# Altium PCB flight-controller.PcbDoc
Units mil, origin at the board's own origin, x right, y up, seen from the top; angles counter-clockwise.
Board outline 6000 x 4000 mil, 4 copper layers (Component Side, Ground Plane, Power Plane, Solder Side), stack 60.4 mil thick; 114 components, 84 nets, 385 pads, 4 vias.
Unrouted connection lines stored in the file: 278.
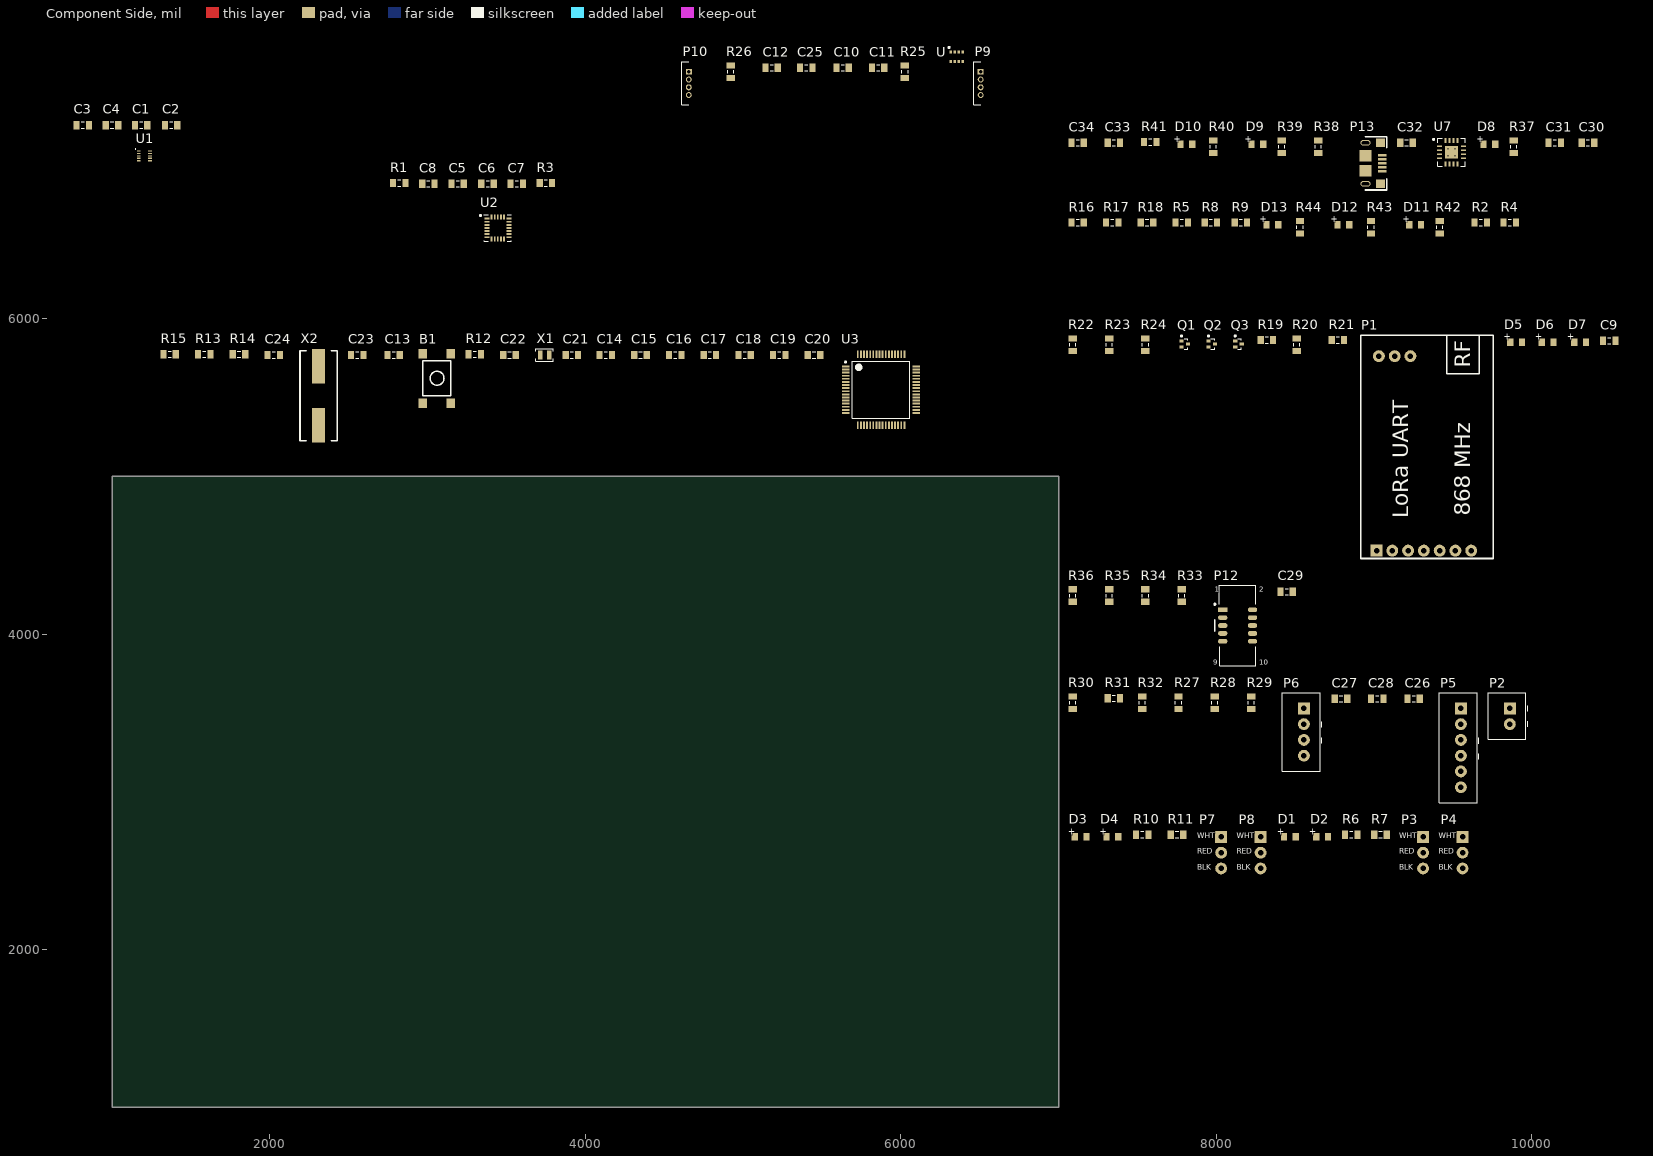
[diagram p0: Component Side view]
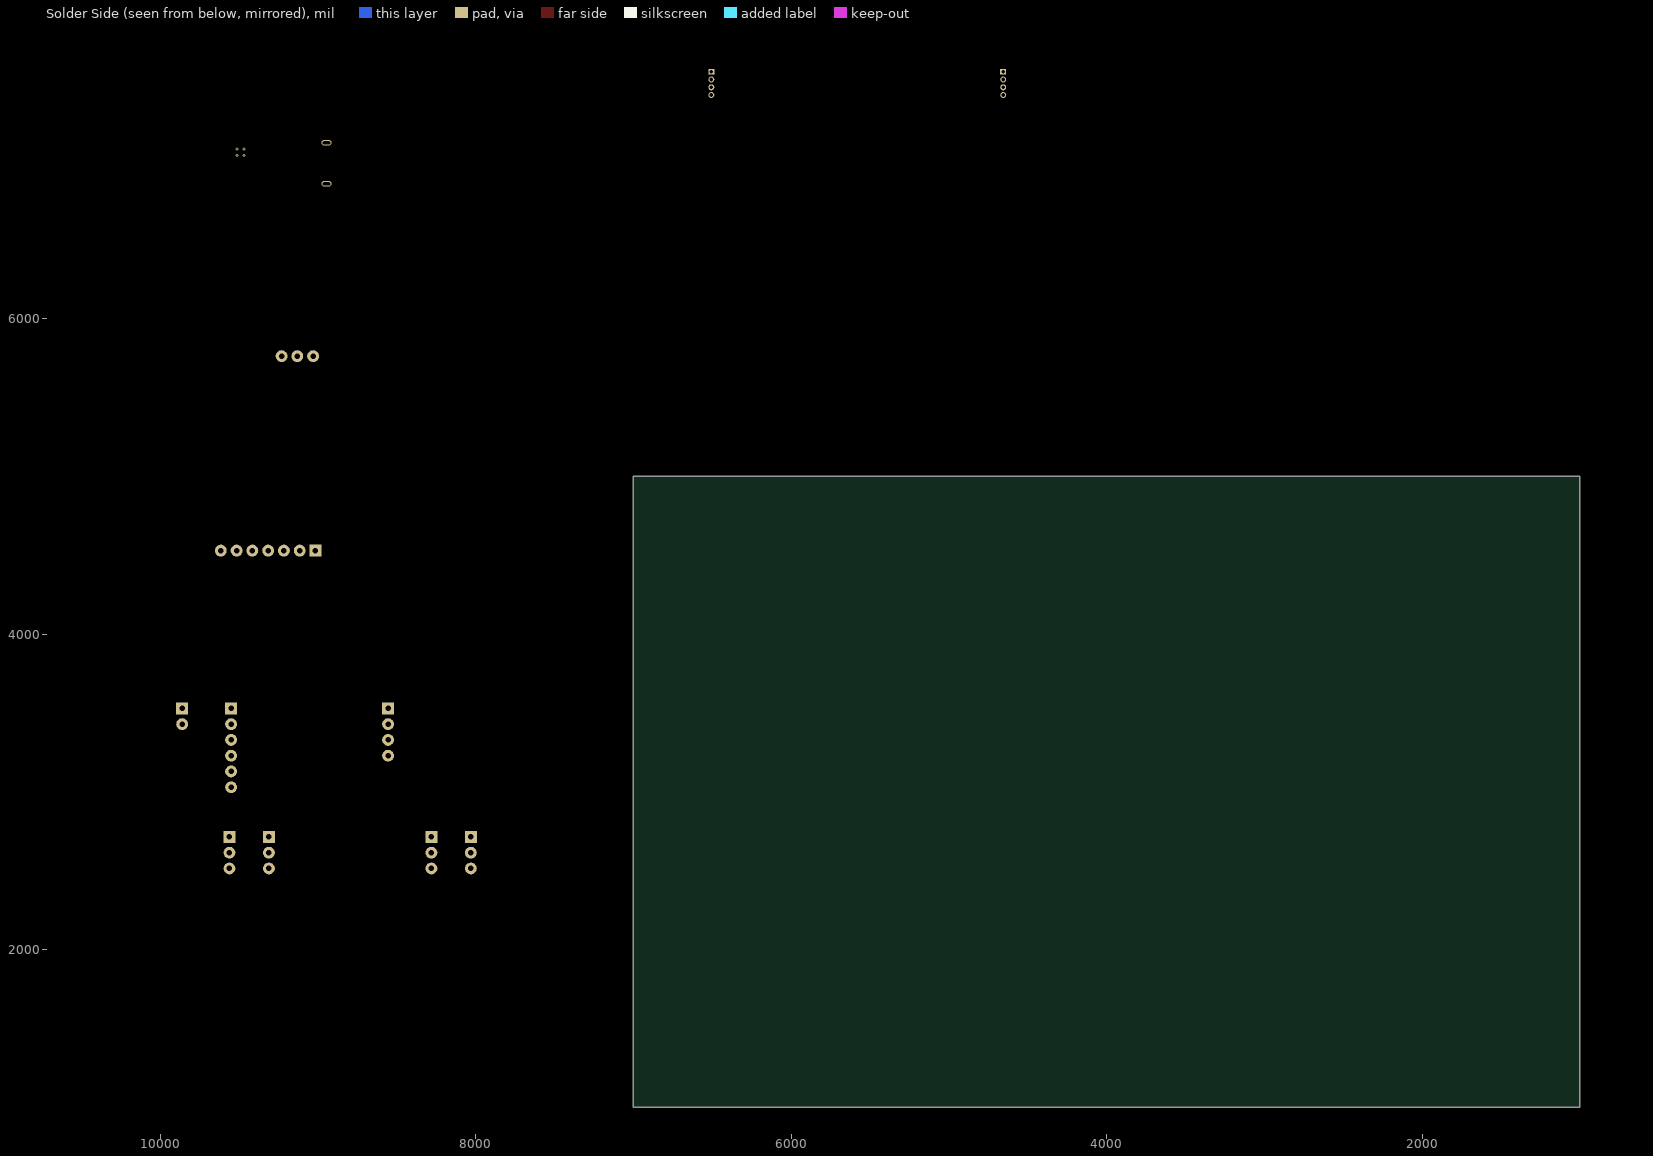
[diagram p1: Solder Side view, seen from below]
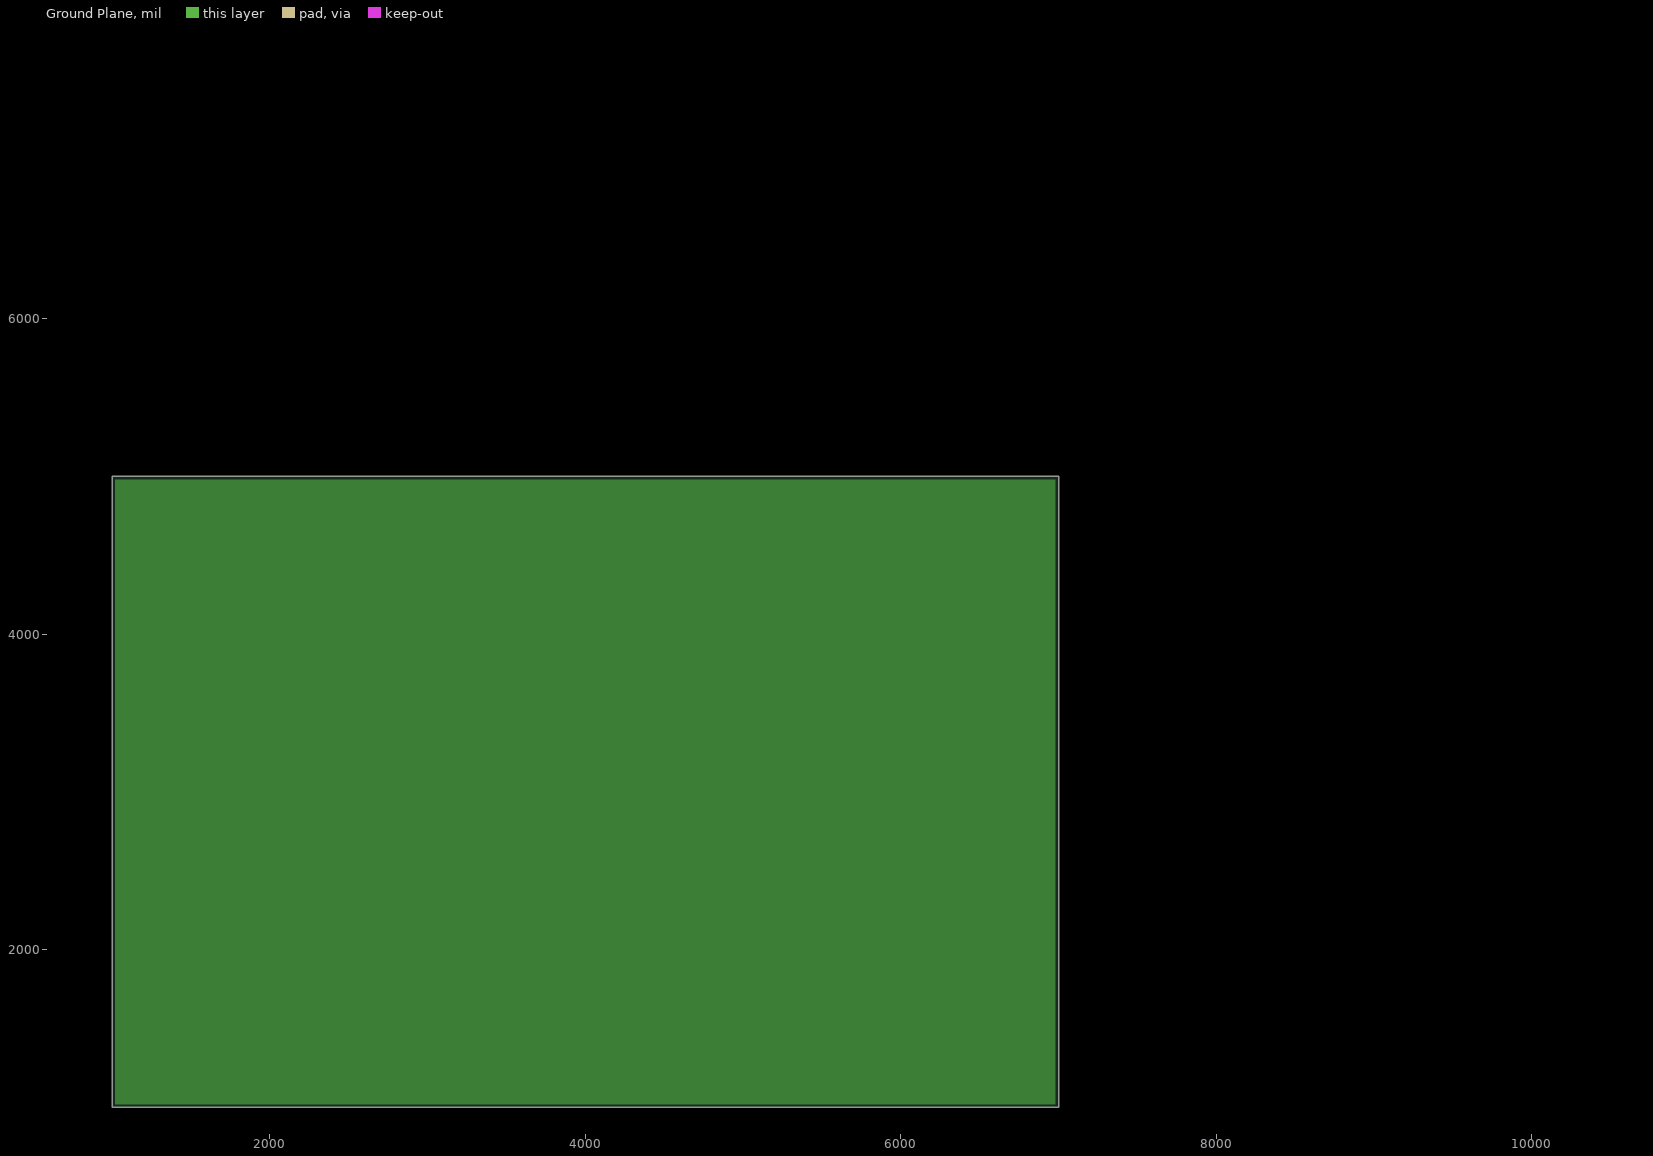
[diagram p2: Ground Plane, clearances drawn from the general rule]
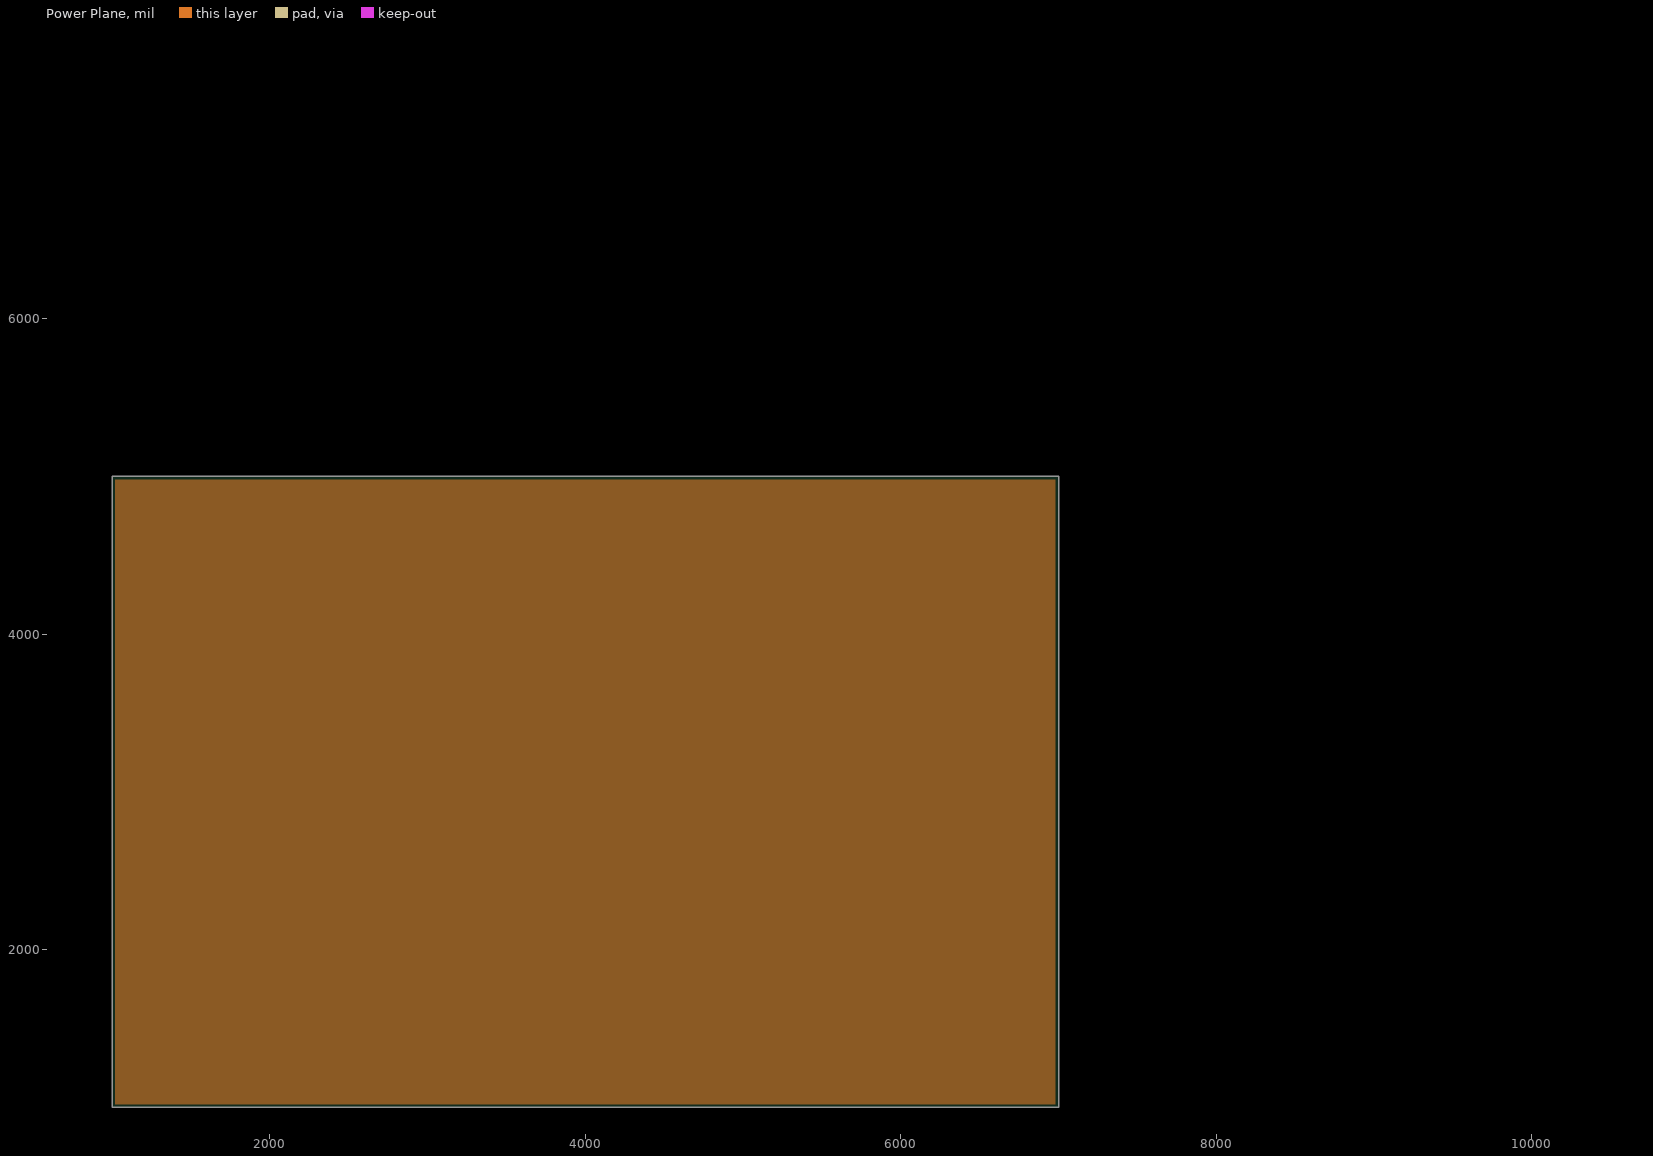
[diagram p3: Power Plane, clearances drawn from the general rule]

## Layer stack, top to bottom
Top Solder: solder mask 0.4, Solder Resist, Dk 3.5
Component Side: signal copper 1.4
Dielectric 1: prepreg 7.5, Dk 4.3
Ground Plane: plane copper 2.8
Dielectric 3: core 37, FR-4, Dk 4.3
Power Plane: plane copper 2.8
Dielectric 4: prepreg 7.5, Dk 4.3
Solder Side: signal copper 1.4
Bottom Solder: solder mask 0.4, Solder Resist, Dk 3.5

## Board outline
1000,1000 7000,1000 7000,5000 1000,5000

## Design rules (kind name [scope] priority, off if disabled: settings)
Clearance [All] p1: gap=10 ignorepadtopadclearanceinfootprint=FALSE except(0: Arc-Hole Track-Hole SMDPad-Hole THPad-Hole Via-Hole Fill-Hole Poly-Hole Region-Hole Text-Hole)
PlaneClearance [All] p1: clearance=20
PlaneConnect [All] p1: planeconnectstyle=Relief reliefexpansion=20 reliefentries=4 reliefconductorwidth=10 reliefairgap=10
PolygonConnect [All] p1: connectstyle=Relief reliefconductorwidth=10 reliefentries=4 polygonreliefangle="90 Angle" airgapwidth=10
RoomDefinition usb_serial [InComponentClass('usb_serial')] p1: confinementstyle=ConfineIn formatcopy=TRUE lockcomponents=FALSE outline 7045,6805 10475,6805 10475,7265 7045,7265
RoomDefinition top_level [InComponentClass('top_level')] p2: confinementstyle=ConfineIn formatcopy=TRUE lockcomponents=FALSE outline 7045,6505 9935,6505 9935,6755 7045,6755
RoomDefinition sensors [InComponentClass('sensors')] p3: confinementstyle=ConfineIn formatcopy=TRUE lockcomponents=FALSE outline 4600.63,7345 6690.63,7345 6690.63,7740 4600.63,7740
RoomDefinition radio [InComponentClass('radio')] p4: confinementstyle=ConfineIn formatcopy=TRUE lockcomponents=FALSE outline 7045,4470 10565,4470 10565,6010 7045,6010
RoomDefinition programming [InComponentClass('programming')] p5: confinementstyle=ConfineIn formatcopy=TRUE lockcomponents=FALSE outline 7045,3790 8565,3790 8565,4420 7045,4420
RoomDefinition power [InComponentClass('power')] p6: confinementstyle=ConfineIn formatcopy=TRUE lockcomponents=FALSE outline 7045,2920 9985,2920 9985,3740 7045,3740
RoomDefinition motor_control [InComponentClass('motor_control')] p7: confinementstyle=ConfineIn formatcopy=TRUE lockcomponents=FALSE outline 7045,2460 9615,2460 9615,2875 7045,2875
RoomDefinition mcu_power [InComponentClass('mcu_power')] p8: confinementstyle=ConfineIn formatcopy=TRUE lockcomponents=FALSE outline 1289.37,5205 6144.37,5205 6144.37,5920 1289.37,5920
RoomDefinition gyro [InComponentClass('gyro')] p9: confinementstyle=ConfineIn formatcopy=TRUE lockcomponents=FALSE outline 2745,6360 4100,6360 4100,7005 2745,7005
RoomDefinition accelerometer [InComponentClass('accelerometer')] p10: confinementstyle=ConfineIn formatcopy=TRUE lockcomponents=FALSE outline 739.13,6822.24 1624.13,6822.24 1624.13,7377.24 739.13,7377.24
RoutingVias [All] p1: holewidth=28 width=50 viastyle="Through Hole" minholewidth=28 minwidth=50 maxholewidth=28 maxwidth=50
SolderMaskExpansion [All] p1: expansion=4
Width [All] p1: maxlimit=10 minlimit=10 preferedwidth=10
28 further rules are at their usual default settings.

## Classes and differential pairs
component class usb_serial: C30 C31 C32 C33 C34 D8 D9 D10 P13 R37 R38 R39 R40 R41 U7
component class top_level: D11 D12 D13 R2 R4 R5 R8 R9 R16 R17 R18 R42 R43 R44
component class sensors: C10 C11 C12 C25 P9 P10 R25 R26 U
component class radio: C9 D5 D6 D7 P1 Q1 Q2 Q3 R19 R20 R21 R22 R23 R24
component class programming: C29 P12 R33 R34 R35 R36
component class power: C26 C27 C28 P2 P5 P6 R27 R28 R29 R30 R31 R32
component class motor_control: D1 D2 D3 D4 P3 P4 P7 P8 R6 R7 R10 R11
component class mcu_power: B1 C13 C14 C15 C16 C17 C18 C19 C20 C21 C22 C23 C24 R12 R13 R14 R15 U3 X1 X2
component class gyro: C5 C6 C7 C8 R1 R3 U2
component class accelerometer: C1 C2 C3 C4 U1

## Components (designator, comment, footprint, x,y, rotation, side; value= is the part's Value field where it differs from the comment)
B1 "Tactile Switch" "6mm Tactile Switch" 2969.37,5465 r90 top
C1 "1 uF" CAP-CER-0805-TALL 1184.13,7227.24 r0 top
C2 "0.1 uF" CAP-CER-0805-SHORT 1374.13,7227.24 r0 top
C3 "0.1 uF" CAP-CER-0805-SHORT 814.13,7227.24 r0 top
C4 "0.1 uF" CAP-CER-0805-SHORT 999.13,7227.24 r0 top
C5 "1 uF" CAP-CER-0805-TALL 3190,6855 r0 top
C6 "0.1 uF" CAP-CER-0805-SHORT 3380,6855 r0 top
C7 "0.1 uF" CAP-CER-0805-SHORT 3565,6855 r0 top
C8 "0.1 uF" CAP-CER-0805-SHORT 3005,6855 r0 top
C9 "1 uF" CAP-CER-0805-TALL 10490,5860 r0 top
C10 "0.1 uF" CAP-CER-0805-SHORT 5630.63,7590 r0 top
C11 "10 nF" CAP-CER-0805-SHORT 5855.63,7590 r0 top
C12 "0.1 uF" CAP-CER-0805-SHORT 5180.63,7590 r0 top
C13 "0.1 uF" CAP-CER-0805-SHORT 2784.37,5770 r0 top
C14 "4.7 uF" CAP-CER-0805-TALL 4129.37,5770 r0 top
C15 "0.1 uF" CAP-CER-0805-SHORT 4349.37,5770 r0 top
C16 "0.1 uF" CAP-CER-0805-SHORT 4569.37,5770 r0 top
C17 "0.1 uF" CAP-CER-0805-SHORT 4789.37,5770 r0 top
C18 "0.1 uF" CAP-CER-0805-SHORT 5009.37,5770 r0 top
C19 "1 uF" CAP-CER-0805-TALL 5229.37,5770 r0 top
C20 "10 nF" CAP-CER-0805-SHORT 5449.37,5770 r0 top
C21 "1 pF" CAP-CER-0805-SHORT 3914.37,5770 r0 top
C22 "1 pF" CAP-CER-0805-SHORT 3519.37,5770 r0 top
C23 "16 pF" CAP-CER-0805-SHORT 2554.37,5770 r0 top
C24 "16 pF" CAP-CER-0805-SHORT 2024.37,5770 r0 top
C25 "0.1 uF" CAP-CER-0805-SHORT 5400.63,7590 r0 top
C26 "100 pF" CAP-CER-0805-SHORT 9250,3590 r0 top
C27 "4.7 uF" CAP-CER-0805-TALL 8790,3590 r0 top
C28 "4.7 uF" CAP-CER-0805-TALL 9020,3590 r0 top
C29 "0.1 uF" CAP-CER-0805-SHORT 8445,4270 r0 top
C30 "4.7 uF" CAP-CER-0805-TALL 10355,7115 r0 top
C31 "0.1 uF" CAP-CER-0805-SHORT 10145,7115 r0 top
C32 "47 pF" CAP-CER-0805-SHORT 9205,7115 r0 top
C33 "47 pF" CAP-CER-0805-SHORT 7350,7115 r0 top
C34 "0.1 uF" CAP-CER-0805-SHORT 7120,7115 r0 top
D1 "LED-WHT-20mA" LED-0805 8465,2715 r0 top
D2 "LED-WHT-20mA" LED-0805 8670,2715 r0 top
D3 "LED-WHT-20mA" LED-0805 7140,2715 r0 top
D4 "LED-WHT-20mA" LED-0805 7340,2715 r0 top
D5 "LED-WHT-20mA" LED-0805 9900,5850 r0 top
D6 "LED-WHT-20mA" LED-0805 10100,5850 r0 top
D7 "LED-WHT-20mA" LED-0805 10305,5850 r0 top
D8 "LED-WHT-20mA" LED-0805 9730,7105 r0 top
D9 "LED-WHT-20mA" LED-0805 8260,7105 r0 top
D10 "LED-WHT-20mA" LED-0805 7810,7105 r0 top
D11 "LED-WHT-20mA" LED-0805 9260,6595 r0 top
D12 "LED-WHT-20mA" LED-0805 8805,6595 r0 top
D13 "LED-WHT-20mA" LED-0805 8355,6595 r0 top
P1 "LoRa 868 MHz Radio" "LoRa Breakout" 9015,4530 r90 top
P2 "2Pos Pin Header" "2Pos Pin Header JST" 9860,3530 r0 top
P3 "ESC Data" ESC 9310,2715 r0 top
P4 "ESC Data" ESC 9560,2715 r0 top
P5 "6Pos Pin Header" "6Pos Pin Header JST" 9550,3530 r0 top
P6 "4Pos Pin Header" "4Pos Pin Header JST" 8555,3530 r0 top
P7 "ESC Data" ESC 8030,2715 r0 top
P8 "ESC Data" ESC 8280,2715 r0 top
P9 "Lidar Range Sensor" "4x1 Shrouded Header 1.25mm" 6505.63,7565 r0 top
P10 "Lidar Range Sensor" "4x1 Shrouded Header 1.25mm" 4655.63,7565 r0 top
P12 "JTAG Header" "SMD Header 5x2x1.27mm" 8040,4155 r0 top
P13 "USB Micro B" "USB Micro B" 8945,6985 r0 top
Q1 "2N7002K" SC-89 7800,5840 r0 top
Q2 "2N7002K" SC-89 7970,5840 r0 top
Q3 "2N7002K" SC-89 8140,5840 r0 top
R1 "47K" RES-0805 2820,6860 r0 top
R2 "10K" RES-0805 9675,6610 r0 top
R3 "47K" RES-0805 3750,6860 r0 top
R4 "10K" RES-0805 9860,6610 r0 top
R5 "47K" RES-0805 7780,6610 r0 top
R6 "330" RES-0805 8855,2730 r0 top
R7 "330" RES-0805 9040,2730 r0 top
R8 "47K" RES-0805 7965,6610 r0 top
R9 "47K" RES-0805 8155,6610 r0 top
R10 "330" RES-0805 7530,2730 r0 top
R11 "330" RES-0805 7750,2730 r0 top
R12 "0" RES-0805 3299.37,5775 r0 top
R13 "10K" RES-0805 1584.37,5775 r0 top
R14 "0" RES-0805 1804.37,5775 r0 top
R15 "10K" RES-0805 1364.37,5775 r0 top
R16 "47K" RES-0805 7120,6610 r0 top
R17 "47K" RES-0805 7340,6610 r0 top
R18 "47K" RES-0805 7560,6610 r0 top
R19 "330" RES-0805 8320,5865 r0 top
R20 "330" RES-0805 8510,5835 r90 top
R21 "330" RES-0805 8770,5865 r0 top
R22 "100K" RES-0805 7090,5835 r90 top
R23 "100K" RES-0805 7320,5835 r90 top
R24 "100K" RES-0805 7550,5835 r90 top
R25 "0" RES-0805 6025.63,7565 r90 top
R26 "0" RES-0805 4920.63,7565 r90 top
R27 "100K" RES-0805 7760,3565 r90 top
R28 "300K" RES-0805 7990,3565 r90 top
R29 "750K" RES-0805 8220,3565 r90 top
R30 "100K" RES-0805 7090,3565 r90 top
R31 "100K" RES-0805 7350,3595 r0 top
R32 "150K" RES-0805 7530,3565 r90 top
R33 "100K" RES-0805 7780,4245 r90 top
R34 "100K" RES-0805 7550,4245 r90 top
R35 "100K" RES-0805 7320,4245 r90 top
R36 "100K" RES-0805 7090,4245 r90 top
R37 "330" RES-0805 9885,7090 r90 top
R38 "33" RES-0805 8645,7090 r90 top
R39 "33" RES-0805 8415,7090 r90 top
R40 "330" RES-0805 7980,7090 r90 top
R41 "330" RES-0805 7580,7120 r0 top
R42 "680" RES-0805 9415,6580 r90 top
R43 "680" RES-0805 8980,6580 r90 top
R44 "680" RES-0805 8530,6580 r90 top
U "BMP280" LGA8 6315.63,7630 r90 top
U1 "3-Axis Accelerometer" SON10 1204.57,7031.5 r0 top
U2 "3-Axis Gyroscope" QFN24 3445,6575.12 r0 top
U3 "LQFP-64 STM32F303RE" LQFP64 5874.37,5550 r0 top
U7 "FTDI USB to UART" QFN16-0.65 9490,7055 r0 top
X1 "32.768 MHz, 4 pF" XTAL-0805 3714.37,5770 r0 top
X2 "8 MHz, 18 pF" HC-49 2309.37,5325 r90 top

## Footprints (in the part's own frame and the unit in brackets; to place one, negate y for a bottom-side part, rotate by r counter-clockwise, add the part's x,y. Pads: shape width x height; smd on the part's side, far side on the other; paste and mask are expansions set on the pad)
"2Pos Pin Header JST" [mil] "Female, 0.1\" Pitch"
  rect 75x75 hole 35: 1(0,0)
  round 75 hole 35: 2(0,-100)
  silkscreen extent -138,-197 114,98, body extent -132,-192 98,92, height 284
"4Pos Pin Header JST" [mil] "Male, 0.1\" Pitch"
  rect 75x75 hole 35: 1(0,0)
  round 75 hole 35: 2(0,-100) 3(0,-200) 4(0.01,-300)
  silkscreen extent -138,-398 114,98, body extent -132,-392 98,92, height 284
"4x1 Shrouded Header 1.25mm" [mm] "1.25mm Pitch"
  rect 0.95x0.95 hole 0.6: 1(0,0)
  round 0.95 hole 0.6: 2(0,-1.25) 3(0,-2.5) 4(0,-3.75)
  silkscreen extent -1.14,-5.33 0,1.65, body extent -0.9,-5.2 4.5,1.45, height 3.68
"6mm Tactile Switch" [mm]
  rect 1.55x1.3 smd: 1(0,0) 1(7.95,0) 2(0,-4.5) 2(7.95,-4.5)
  silkscreen extent 1.2,-4.5 6.8,0, body extent -0.5,-5.4 8.5,0.8, height 4.3
"6Pos Pin Header JST" [mil] "Male, 0.1\" Pitch"
  rect 75x75 hole 35: 1(0,0)
  round 75 hole 35: 2(0,-100) 3(0,-200) 4(0.01,-300) 5(0.01,-400) 6(0.02,-500)
  silkscreen extent -138,-598 114,98, body extent -132,-592 98,92, height 284
CAP-CER-0805-SHORT [mm] "Chip Capacitor, 2-Leads, Body 2.00x1.25mm, IPC Medium Density"
  rect 1x1.35 smd: 1(-1,0) 2(1,0)
  silkscreen extent -0.25,-0.5 0.25,0.5, body extent -1.1,-0.72 1.1,0.72, height 0.9
CAP-CER-0805-TALL [mm] "Chip Capacitor, 2-Leads, Body 2.00x1.25mm, IPC Medium Density"
  rect 1x1.35 smd: 1(-1,0) 2(1,0)
  silkscreen extent -0.25,-0.5 0.25,0.5, body extent -1.1,-0.72 1.1,0.72, height 1.1
ESC [mil] "Male, 0.1\" Pitch"
  rect 75x75 hole 35: 1(0,0)
  round 75 hole 35: 2(0,-100) 3(0,-200)
  body extent -50,-250 50,50, height 374
HC-49 [mm] "Crystal Oscillator"
  rect 5.6x2.1 smd: 1(0,0) 2(9.5,0)
  silkscreen extent -2.5,-3 12,3, body extent -1.92,-2.5 11.58,2.5, height 4.3
LED-0805 [mm] "Chip Diode, 2-Leads, Body 2.00x1.25mm, IPC Medium Density"
  rect 1x1.2 smd: 1(-0.95,0) 2(0.95,0)
  body extent -0.9,-0.62 0.9,0.63, height 0.8
LGA8 [mm] "Digital Pressure Sensor"
  rect 0.5x0.35 smd: 1(1.55,0) 2(1.55,-0.65) 3(1.55,-1.3) 4(1.55,-1.95) 5(0,-1.95) 6(0,-1.3) 7(0,-0.65) 8(0,0)
  silkscreen extent 2.16,0.13 2.41,0.38, body extent -0.22,-2.27 1.78,0.23, height 0.95
"LoRa Breakout" [mil] "0.1\" Pitch"
  rect 75x75 hole 35: 1(0,0)
  round 75 hole 35: 2(0,-100) 3(0,-200) 4(0,-300) 5(0,-400) 6(0,-500) 7(0,-600) H(1232.5,-215) H(1232.5,-115) H(1232.5,-15)
  silkscreen extent -50,-740 1365,100
LQFP64 [mm] "TSQFP, 64-Leads, Body 10.00x10.00mm, Pitch 0.50mm, IPC Medium Density"
  rect 1.2x0.3 smd: 1(-5.7,3.75) 2(-5.7,3.25) 3(-5.7,2.75) 4(-5.7,2.25) 5(-5.7,1.75) 6(-5.7,1.25) 7(-5.7,0.75) 8(-5.7,0.25) 9(-5.7,-0.25) 10(-5.7,-0.75) 11(-5.7,-1.25) 12(-5.7,-1.75) 13(-5.7,-2.25) 14(-5.7,-2.75) 15(-5.7,-3.25) 16(-5.7,-3.75) 33(5.7,-3.75) 34(5.7,-3.25) 35(5.7,-2.75) 36(5.7,-2.25) 37(5.7,-1.75) 38(5.7,-1.25) 39(5.7,-0.75) 40(5.7,-0.25) 41(5.7,0.25) 42(5.7,0.75) 43(5.7,1.25) 44(5.7,1.75) 45(5.7,2.25) 46(5.7,2.75) 47(5.7,3.25) 48(5.7,3.75)
  rect 0.3x1.2 smd: 17(-3.75,-5.7) 18(-3.25,-5.7) 19(-2.75,-5.7) 20(-2.25,-5.7) 21(-1.75,-5.7) 22(-1.25,-5.7) 23(-0.75,-5.7) 24(-0.25,-5.7) 25(0.25,-5.7) 26(0.75,-5.7) 27(1.25,-5.7) 28(1.75,-5.7) 29(2.25,-5.7) 30(2.75,-5.7) 31(3.25,-5.7) 32(3.75,-5.7) 49(3.75,5.7) 50(3.25,5.7) 51(2.75,5.7) 52(2.25,5.7) 53(1.75,5.7) 54(1.25,5.7) 55(0.75,5.7) 56(0.25,5.7) 57(-0.25,5.7) 58(-0.75,5.7) 59(-1.25,5.7) 60(-1.75,5.7) 61(-2.25,5.7) 62(-2.75,5.7) 63(-3.25,5.7) 64(-3.75,5.7)
  silkscreen extent -5.82,-4.6 4.6,4.6, body extent -6,-6 6,6, height 1.6
QFN16-0.65 [mm] "QFN, 16-Leads, Body 4.00x4.00mm, Pitch 0.65mm, Thermal Pad 2.08x2.08mm, IPC Medium Density"
  rect 0.8x0.28 smd: 1(-1.9,0.975) 2(-1.9,0.325) 3(-1.9,-0.325) 4(-1.9,-0.975) 9(1.9,-0.975) 10(1.9,-0.325) 11(1.9,0.325) 12(1.9,0.975)
  rect 0.28x0.8 smd: 5(-0.975,-1.9) 6(-0.325,-1.9) 7(0.325,-1.9) 8(0.975,-1.9) 13(0.975,1.9) 14(0.325,1.9) 15(-0.325,1.9) 16(-0.975,1.9)
  rect 2.08x2.08 smd: 17(0,0)
  silkscreen extent -3,-2.23 2.23,2.22, body extent -2.12,-2.12 2.12,2.12, height 0.8
QFN24 [mm] "QFN, 24-Leads, Body 4.00x4.00mm, Pitch 0.50mm, IPC Medium Density"
  rect 0.8x0.3 smd: 1(-1.775,1.5) 2(-1.775,1) 3(-1.775,0.5) 4(-1.775,0) 5(-1.775,-0.5) 6(-1.775,-1) 7(-1.775,-1.5) 13(1.775,-1.5) 14(1.775,-1) 15(1.775,-0.5) 16(1.775,0) 17(1.775,0.5) 18(1.775,1) 19(1.775,1.5)
  rect 0.3x0.8 smd: 8(-1,-1.775) 9(-0.5,-1.775) 10(0,-1.775) 11(0.5,-1.775) 12(1,-1.775) 20(1,1.775) 21(0.5,1.775) 22(0,1.775) 23(-0.5,1.775) 24(-1,1.775)
  silkscreen extent -2.92,-2.15 2.15,2.15, body extent -2.05,-2.05 2.05,2.05, height 1.05
RES-0805 [mm] "Chip Resistor, 2-Leads, Body 2.00x1.25mm, IPC Medium Density"
  rect 1x1.35 smd: 1(-1,0) 2(1,0)
  silkscreen extent -0.25,-0.5 0.25,0.5, body extent -1.07,-0.7 1.07,0.7, height 0.65
SC-89 [mm] "SOT23, 3-Leads, Body 1.60x1.60mm, Pitch 0.50mm, IPC Medium Density"
  rect 0.65x0.46 smd: 1(-0.525,0.5) 2(-0.525,-0.5) 3(0.525,0)
  silkscreen extent -0.65,-0.85 0.48,1.4, body extent -0.82,-0.85 0.82,0.85, height 0.8
"SMD Header 5x2x1.27mm" [mm]
  rect 1.5x0.76 smd: 1(0,0)
  oval 1.5x0.76 smd: 2(4.8,0) 3(0,-1.27) 4(4.8,-1.27) 5(0,-2.54) 6(4.8,-2.54) 7(0,-3.81) 8(4.8,-3.81) 9(0,-5.08) 10(4.8,-5.08)
  silkscreen extent -1.4,-9.02 5.33,3.94, body extent -0.35,-8.86 5.15,3.78, height 5.6
SON10 [mm] "SON, 10-Leads, Body 2.00x2.00mm, Pitch 0.40mm, IPC Medium Density"
  rect 0.6x0.225 smd: 1(-0.9,0.8) 2(-0.9,0.4) 3(-0.9,0) 4(-0.9,-0.4) 5(-0.9,-0.8) 6(0.9,-0.8) 7(0.9,-0.4) 8(0.9,0) 9(0.9,0.4) 10(0.9,0.8)
  silkscreen extent -1.46,1.07 -1.36,1.17, body extent -1.08,-1 1.08,1, height 1
"USB Micro B" [mm]
  rect 1.35x0.4 smd: 1(2.675,1.3) 2(2.675,0.65) 3(2.675,0) 4(2.675,-0.65) 5(2.675,-1.3)
  oval 1.6x0.9 hole 0.5 slot 1.2 at 0 deg: S(0,-3.3) S(0,3.3)
  rect 1.9x1.9 smd: S(0,-1.2) S(0,1.2)
  rect 1.4x1.4 smd: S(2.425,-3.3) S(2.425,3.3)
  silkscreen extent 0,-4.3 3.4,4.3, body extent -2.76,-3.93 2.9,3.93, height 2.88
XTAL-0805 [mm] "Crystal Oscillator"
  rect 0.75x1.4 smd: 1(0,0) 2(1.45,0)
  silkscreen extent -0.7,-1 2.1,1, body extent -0.25,-0.62 1.75,0.63, height 0.46

## Part data
B1: "NO, MOM, 6mm", Supplier Part Number 1=CKN9112DKR-ND, Supplier 1=Digi-Key
C1 C5 C19: library part CAP-CER-1uF-10V, "10%, 0805", ComponentLink1Description="Capacitor Book (Amazon)", ComponentLink1URL=https://www.amazon.com/gp/product/B0728HBDRW/
C2 C3 C4 C6 C7 C8 C13 C15 C16 C17 C18: library part CAP-CER-0.1uF-25V, "10%, 0805", ComponentLink1Description="Capacitor Book (Amazon)", ComponentLink1URL=https://www.amazon.com/gp/product/B0728HBDRW/
C9: library part CAP-CER-1uF-10V, "±10%, 0805", ComponentLink1Description="Capacitor Book (Amazon)", ComponentLink1URL=https://www.amazon.com/gp/product/B0728HBDRW/
C10 C12 C25 C29 C31 C34: library part CAP-CER-0.1uF-25V, "±10%, 0805", ComponentLink1Description="Capacitor Book (Amazon)", ComponentLink1URL=https://www.amazon.com/gp/product/B0728HBDRW/
C11: library part CAP-CER-10nF-50V, "±10%, 0805", ComponentLink1Description="Capacitor Book (Amazon)", ComponentLink1URL=https://www.amazon.com/gp/product/B0728HBDRW/
C14: library part CAP-CER-4.7uF-10V, "10%, 0805", ComponentLink1Description="Capacitor Book (Amazon)", ComponentLink1URL=https://www.amazon.com/gp/product/B0728HBDRW/
C20: library part CAP-CER-10nF-50V, "10%, 0805", ComponentLink1Description="Capacitor Book (Amazon)", ComponentLink1URL=https://www.amazon.com/gp/product/B0728HBDRW/
C21 C22: library part CAP-CER-1pF-50V, "±0.25pF, 0805", ComponentLink1Description="Capacitor Book (Amazon)", ComponentLink1URL=https://www.amazon.com/gp/product/B0728HBDRW/
C23 C24: library part CAP-CER-16pF-50V, "±5%, 0805", ComponentLink1Description="Capacitor Book (Amazon)", ComponentLink1URL=https://www.amazon.com/gp/product/B0728HBDRW/
C26: library part CAP-CER-100pF-50V, "±0.25pF, 0805", ComponentLink1Description="Capacitor Book (Amazon)", ComponentLink1URL=https://www.amazon.com/gp/product/B0728HBDRW/
C27 C28 C30: library part CAP-CER-4.7uF-10V, "±10%, 0805", ComponentLink1Description="Capacitor Book (Amazon)", ComponentLink1URL=https://www.amazon.com/gp/product/B0728HBDRW/
C32 C33: library part CAP-CER-47pF-50V, "±5%, 0805", ComponentLink1Description="Capacitor Book (Amazon)", ComponentLink1URL=https://www.amazon.com/gp/product/B0728HBDRW/
D1 D2 D3 D4 D5 D6 D7 D8 D9 D10 D11 D12 D13: "2.2V, 0805", Supplier Part Number 1=475-1410-1-ND, ComponentLink1Description="Resistor Book (Amazon)", ComponentLink1URL=https://www.amazon.com/gp/product/B071J21FYF/, Supplier 1=Digi-Key
P1: library part "868 MHz SX1276 LoRa Breakout", "UART Interface, 0.1\" Pitch, E32 (868T20D) chipset", ComponentLink1Description=Amazon, ComponentLink1URL=https://www.amazon.com/gp/product/B07GPLJTWD/
P2: "0.1\" Pitch 1x2"
P3 P4 P7 P8: library part ESC, ComponentLink1Description="ESC + Motor Combo (Amazon)", ComponentLink1URL=https://www.amazon.com/Hobbypower-1000kv-Brushless-Multicopter-Quadcopter/dp/B00E7LG85O/
P5: "0.1\" Pitch 1x6"
P6: "0.1\" Pitch 1x4"
P9 P10: Supplier Part Number 1=H2201-ND, ComponentLink1Description=Amazon, ComponentLink1URL=https://www.amazon.com/gp/product/B075V5TZRY/, Supplier 1=Digi-Key
P12: library part "10-pin JTAG Header", Supplier Part Number 1=3220-10-0300-00, ComponentLink1Description=Pinout, ComponentLink1URL=http://infocenter.arm.com/help/topic/com.arm.doc.faqs/attached/13634/cortex_debug_connectors.pdf, Supplier 1=Arrow
P13: Supplier Part Number 1=609-4616-6-ND, ComponentLink1Description=Pinout, ComponentLink1URL=http://pinouts.ru/PortableDevices/micro_usb_pinout.shtml, Supplier 1=Digi-Key
Q1 Q2 Q3: library part NMOS-2.0VT-60VDS-300mA, "N-Channel, SOT-23", Supplier Part Number 1=2N7002K-T1-E3DKR-ND, ComponentLink1Description=Datasheet, ComponentLink1URL=https://www.rohm.com/datasheet/RE1C002UN/re1c002untcl-e, Supplier 1=Digi-Key
R1 R3 R5 R8 R9 R16 R17 R18: library part RES-47K-1/8W, "0805", ComponentLink1Description="Resistor Book (Amazon)", ComponentLink1URL=https://www.amazon.com/gp/product/B071J21FYF/
R2 R4 R13 R15: library part RES-10K-1/8W, "0805", ComponentLink1Description="Resistor Book (Amazon)", ComponentLink1URL=https://www.amazon.com/gp/product/B071J21FYF/
R6 R7 R10 R11 R19 R20 R21 R37 R40 R41: library part RES-330-1/8W, "0805", ComponentLink1Description="Resistor Book (Amazon)", ComponentLink1URL=https://www.amazon.com/gp/product/B071J21FYF/
R12 R14 R25 R26: library part RES-0-1/8W, "0805", ComponentLink1Description="Resistor Book (Amazon)", ComponentLink1URL=https://www.amazon.com/gp/product/B071J21FYF/
R22 R23 R24 R27 R30 R31 R33 R34 R35 R36: library part RES-100K-1/8W, "0805", ComponentLink1Description="Resistor Book (Amazon)", ComponentLink1URL=https://www.amazon.com/gp/product/B071J21FYF/
R28: library part RES-300K-1/8W, "0805", ComponentLink1Description="Resistor Book (Amazon)", ComponentLink1URL=https://www.amazon.com/gp/product/B071J21FYF/
R29: library part RES-750K-1/8W, "0805", ComponentLink1Description="Resistor Book (Amazon)", ComponentLink1URL=https://www.amazon.com/gp/product/B071J21FYF/
R32: library part RES-150K-1/8W, "0805", ComponentLink1Description="Resistor Book (Amazon)", ComponentLink1URL=https://www.amazon.com/gp/product/B071J21FYF/
R38 R39: library part RES-33-1/8W, "0805", ComponentLink1Description="Resistor Book (Amazon)", ComponentLink1URL=https://www.amazon.com/gp/product/B071J21FYF/
R42 R43 R44: library part RES-680-1/8W, "0805", ComponentLink1Description="Resistor Book (Amazon)", ComponentLink1URL=https://www.amazon.com/gp/product/B071J21FYF/
U: "Digital Pressure Sensor", Supplier Part Number 1=828-1064-6-ND, ComponentLink1Description=Datasheet, ComponentLink1URL=https://ae-bst.resource.bosch.com/media/_tech/media/datasheets/BST-BMP280-DS001-19.pdf, Supplier 1=Digi-Key
U1: library part MMA8652FC, "3-Axis, 12-bit Digital Accelerometer, I2C 400kHz", Supplier Part Number 1=MMA8652FCR1DKR-ND, ComponentLink1Description=Datasheet, ComponentLink1URL=https://media.digikey.com/pdf/Data%20Sheets/NXP%20PDFs/MMA8652FC.pdf, Supplier 1=Digi-Key
U2: library part FXAS21002C, "3-Axis Digital Angular Rate Gyroscope", Supplier Part Number 1=FXAS21002CQR1CT-ND, ComponentLink1Description=Datasheet, ComponentLink1URL=http://cache.freescale.com/files/sensors/doc/data_sheet/FXAS21002.pdf, Supplier 1=Digi-Key
U3: library part STM32F303RET6, "ARM Cortex-M4 32-bit MCU+FPU", Supplier Part Number 1=497-15163-ND, ComponentLink1Description=NUCLEO-F303RE, ComponentLink1URL=https://www.st.com/content/st_com/en/products/evaluation-tools/product-evaluation-tools/mcu-eval-tools/stm32-mcu-eval-tools/stm32-mcu-nucleo/nucleo-f303re.html, ComponentLink2Description=MBED, ComponentLink2URL=https://os.mbed.com/platforms/ST-Nucleo-F303RE/, ComponentLink3Description=Datasheet, ComponentLink3URL=https://www.st.com/content/ccc/resource/technical/document/datasheet/2c/6f/d7/64/1f/a3/4f/c9/DM00118585.pdf/files/DM00118585.pdf/jcr:content/translations/en.DM00118585.pdf, ComponentLink4Description="Reference Manual", ComponentLink4URL=https://www.st.com/content/ccc/resource/technical/document/reference_manual/4a/19/6e/18/9d/92/43/32/DM00043574.pdf/files/DM00043574.pdf/jcr:content/translations/en.DM00043574.pdf, Supplier 1=Digi-Key
U7: library part FT230XQ-R, Supplier Part Number 1=768-1130-6-ND, ComponentLink1Description=Datasheet, ComponentLink1URL=https://www.ftdichip.com/Support/Documents/DataSheets/ICs/DS_FT230X.pdf, Supplier 1=Digi-Key
X1: library part XTAL-32.768kHz-4pF, "Crystal, 0805", Supplier Part Number 1=535-12373-6-ND, ComponentLink1Description=Datasheet, ComponentLink1URL=https://abracon.com/Resonators/ABS06-107-32.768kHz-T.pdf, Supplier 1=Digi-Key
X2: library part XTAL-8MHz-18pF, "Crystal, HC-49", Supplier Part Number 1=535-9089-6-ND, ComponentLink1Description=Datasheet, ComponentLink1URL=https://abracon.com/Resonators/abls.pdf, Supplier 1=Digi-Key

## Via types
v1: diameter 19.68, hole 7.87, Component Side to Solder Side, 4 vias

## Nets (pads, with @x,y where several pads share a name; then routed paths per layer and width w, separated by ;. In a path a pad name is that pad's centre, name@x,y a point inside that pad or via, vN(x,y) a via of type N, cw(c..) or ccw(c..) an arc to the next point about the centre after c; other vN are vias at no path point)
3V3: C1.2 C2.2 C4.2 C5.2 C6.2 C7.2 C9.1 C10.2 C11.2 C14.2 C15.2 C16.2 C17.2 C18.2 C19.2 C20.2 C28.2 C29.1 C34.2 D5.1 D6.1 D7.1 D9.1 D10.1 P1.6 P5.5 P5.6 P12.1 R1.1 R2.2 R3.2 R4.2 R5.2 R8.2 R9.2 R13.2 R25.2 R33.2 R34.2 R35.2 U1.1 U1.8 U2.8 U2.15 U2.18 U3.1 U3.13 U3.19 U3.32 U3.48 U3.64 U7.1 U7.9 U.2 U.6 U.8
5V: C27.2 P5.1 P5.2
+5: C12.2 C25.2 P9.3 P10.3
ACC_INT1: U1.3 U3.41
ACC_INT2: U1.5 U3.40
CURR_MEAS: C26.2 P2.1 U3.36
GND: B1.2 C1.1 C2.1 C3.1 C4.1 C5.1 C6.1 C7.1 C8.1 C9.2 C10.1 C11.1 C12.1 C13.1 C14.1 C15.1 C16.1 C17.1 C18.1 C19.1 C20.1 C21.1 C22.1 C23.1 C24.1 C25.1 C26.1 C27.1 C28.1 C29.2 C30.2 C31.2 C32.2 C33.1 C34.1 P1.7 P2.2 P3.3 P4.3 P5.3 P5.4 P6.4 P7.3 P8.3 P9.4 P10.4 P12.3 P12.5 P12.9 P13.5 Q1.2 Q2.2 Q3.2 R6.2 R7.2 R10.2 R11.2 R15.1 R16.1 R17.1 R18.1 R22.1 R23.1 R24.1 R26.1 R30.1 R31.1 R32.1 R36.1 R37.1 R42.2 R43.2 R44.2 U1.6 U1.7 U1.9 U2.1 U2.5 U2.6 U2.7 U2.9 U2.10 U2.14 U2.19 U2.20 U2.21 U2.22 U2.23 U2.24 U3.12 U3.18 U3.31 U3.47 U3.63 U7.3 U7.13 U7.17 U.1 U.7
  other v1: 9468.35,7033.35 9511.65,7033.35 9468.35,7076.65 9511.65,7076.65
GYRO_CS: R1.2 U2.17 U3.20
GYRO_INT1: U2.3 U3.8
GYRO_INT2: U2.2 U3.9
GYRO_MISO: R8.1 R17.2 U2.13 U3.22
GYRO_MOSI: R9.1 R18.2 U2.12 U3.23
GYRO_RST: R3.1 U2.4 U3.10
GYRO_SCLK: R5.1 R16.2 U2.11 U3.21
I2C2_SCL: R4.1 U1.2 U3.42 U.4
I2C2_SDA: R2.1 U1.10 U3.43 U.3
JTAG_TCK: P12.4 R36.2 U3.49
JTAG_TDI: P12.8 R34.1 U3.50
JTAG_TDO: P12.6 R33.1 U3.55
JTAG_TMS: P12.2 R35.1 U3.46
LIDAR1_RX: P9.2 U3.16
LIDAR1_TX: P9.1 U3.17
LIDAR2_RX: P10.2 U3.62
LIDAR2_TX: P10.1 U3.61
NEGX_PWM: P3.1 U3.27
NEGY_PWM: P7.1 U3.56
NetC3_2: C3.2 U1.4
NetC8_2: C8.2 U2.16
NetC21_2: C21.2 U3.3 X1.2
NetC22_2: C22.2 R12.1 X1.1
NetC23_2: C23.2 U3.5 X2.2
NetC24_2: C24.2 R14.1 X2.1
NetC32_1: C32.1 R38.2 U7.6
NetC33_2: C33.2 R39.2 U7.7
NetD1_1: D1.1 P3.2
NetD1_2: D1.2 R6.1
NetD2_1: D2.1 P4.2
NetD2_2: D2.2 R7.1
NetD3_1: D3.1 P7.2
NetD3_2: D3.2 R10.1
NetD4_1: D4.1 P8.2
NetD4_2: D4.2 R11.1
NetD5_2: D5.2 R19.2
NetD6_2: D6.2 R20.2
NetD7_2: D7.2 R21.2
NetD8_1: D8.1 U7.8
NetD8_2: D8.2 R37.2
NetD9_2: D9.2 R40.2
NetD10_2: D10.2 R41.2
NetD11_1: D11.1 U3.15
NetD11_2: D11.2 R42.1
NetD12_1: D12.1 U3.14
NetD12_2: D12.2 R43.1
NetD13_1: D13.1 U3.11
NetD13_2: D13.2 R44.1
NetP6_1: P6.1 R29.2
NetP6_2: P6.2 R28.2
NetP6_3: P6.3 R27.2
NetP13_2: P13.2 R39.1
NetP13_3: P13.3 R38.1
NetQ1_3: Q1.3 R19.1
NetQ2_3: Q2.3 R20.1
NetQ3_3: Q3.3 R21.1
NetR12_2: R12.2 U3.4
NetR13_1: R13.1 R15.2 U3.60
NetR14_2: R14.2 U3.6
NetR25_1: R25.1 R26.2 U.5
NetR40_1: R40.1 U7.11
NetR41_1: R41.1 U7.5
NetU7_4: U7.4 U7.16
NRST: B1.1 C13.2 P12.10 U3.7
POSX_PWM: P8.1 U3.26
POSY_PWM: P4.1 U3.57
RADIO_AUX: P1.5 Q3.1 R24.2 U3.28
RADIO_M0: P1.1 Q1.1 R22.2 U3.30
RADIO_M1: P1.2 Q2.1 R23.2 U3.29
RADIO_RX: P1.3 U3.24
RADIO_TX: P1.4 U3.25
USB_5V: C30.1 C31.1 P13.1 U7.10
USB_RX: U3.51 U7.2
USB_TX: U3.52 U7.15
VBATT_1S: R27.1 R30.2 U3.35
VBATT_2S: R28.1 R31.2 U3.34
VBATT_3S: R29.1 R32.2 U3.33
pads on no net: P1.H P12.7 P13.4 P13.S U3.2 U3.37 U3.38 U3.39 U3.44 U3.45 U3.53 U3.54 U3.58 U3.59 U7.12 U7.14

## Polygon pours and split planes (outlines as drawn)
no net on Ground Plane (split plane): 6979.9,1020.1 1020.1,1020.1 1020.1,4979.9 6979.9,4979.9
no net on Power Plane (split plane): 6979.9,1020.1 1020.1,1020.1 1020.1,4979.9 6979.9,4979.9

## Text inside footprints (layer, text, board x,y; h text height)
D1: Top Overlay "+" at 8385,2730 h39.37
D2: Top Overlay "+" at 8590,2730 h39.37
D3: Top Overlay "+" at 7060,2730 h39.37
D4: Top Overlay "+" at 7260,2730 h39.37
D5: Top Overlay "+" at 9820,5865 h39.37
D6: Top Overlay "+" at 10020,5865 h39.37
D7: Top Overlay "+" at 10225,5865 h39.37
D8: Top Overlay "+" at 9650,7120 h39.37
D9: Top Overlay "+" at 8180,7120 h39.37
D10: Top Overlay "+" at 7730,7120 h39.37
D11: Top Overlay "+" at 9180,6610 h39.37
D12: Top Overlay "+" at 8725,6610 h39.37
D13: Top Overlay "+" at 8275,6610 h39.37
P1: Top Overlay "868 MHz" at 9610,4750 h100 r90; Top Overlay "LoRa UART" at 9215,4735 h100 r90; Top Overlay "RF" at 9610,5690 h100 r90
P3: Top Overlay "BLK" at 9160,2495 h60; Top Overlay "RED" at 9160,2595 h60; Top Overlay "WHT" at 9160,2695 h60
P4: Top Overlay "BLK" at 9410,2495 h60; Top Overlay "RED" at 9410,2595 h60; Top Overlay "WHT" at 9410,2695 h60
P7: Top Overlay "BLK" at 7880,2495 h60; Top Overlay "RED" at 7880,2595 h60; Top Overlay "WHT" at 7880,2695 h60
P8: Top Overlay "BLK" at 8130,2495 h60; Top Overlay "RED" at 8130,2595 h60; Top Overlay "WHT" at 8130,2695 h60
P12: Top Overlay "1" at 7990,4270 h31.5; Top Overlay "2" at 8270,4270 h31.5; Top Overlay "9" at 7980,3805.99 h31.5; Top Overlay "10" at 8270,3805.99 h31.5